# EAGLE board CT_schematic (EAGLE 7.6.0)

Size 100 x 80 mm. Coordinates in mm from the lower left corner, seen from the top.
Outline: 0,0 100,0 100,80 0,80 0,0
Copper layers (1*16): Top 0.035mm / dielectric 1.5mm / Bottom 0.035mm
Design rules "default": minimum track width 10mil, minimum drill 24mil, track to track 8mil, track to pad 8mil, pad to pad 8mil, via to via 8mil, smd to smd 8mil, copper to edge 40mil, drill to drill 8mil, minimum pad ring 10mil, minimum via ring 8mil, stop-mask expansion 4mil, vias tented up to drill 0mil, thermal gap 10mil

## Footprints (pad centres in the part's own frame; a part is rotated, then mirrored left to right if it is on the bottom)
C0603 = smd 0.8 x 0.8: 1 -0.762,0; 2 0.762,0
C0402 = smd 0.5 x 0.5: 1 -0.508,0; 2 0.508,0
C1210 = smd 1.2 x 2.5: 1 -1.524,0; 2 1.524,0
C1206 = smd 1.3 x 1.6: 1 -1.524,0; 2 1.524,0
L0603 = smd 0.8 x 0.8: 1 -0.762,0; 2 0.762,0
R0603 = smd 0.8 x 0.8: 1 -0.762,0; 2 0.762,0
UFBGA64 = smd 0.2 x 0.2: A1 -1.75,1.75; A2 -1.25,1.75; A3 -0.75,1.75; A4 -0.25,1.75; A5 0.25,1.75; A6 0.75,1.75; A7 1.25,1.75; A8 1.75,1.75; B1 -1.75,1.25; B2 -1.25,1.25; B3 -0.75,1.25; B4 -0.25,1.25; B5 0.25,1.25; B6 0.75,1.25; B7 1.25,1.25; B8 1.75,1.25; C1 -1.75,0.75; C2 -1.25,0.75; C3 -0.75,0.75; C4 -0.25,0.75; C5 0.25,0.75; C6 0.75,0.75; C7 1.25,0.75; C8 1.75,0.75; D1 -1.75,0.25; D2 -1.25,0.25; D3 -0.75,0.25; D4 -0.25,0.25; D5 0.25,0.25; D6 0.75,0.25; D7 1.25,0.25; D8 1.75,0.25; E1 -1.75,-0.25; E2 -1.25,-0.25; E3 -0.75,-0.25; E4 -0.25,-0.25; E5 0.25,-0.25; E6 0.75,-0.25; E7 1.25,-0.25; E8 1.75,-0.25; F1 -1.75,-0.75; F2 -1.25,-0.75; F3 -0.75,-0.75; F4 -0.25,-0.75; F5 0.25,-0.75; F6 0.75,-0.75; F7 1.25,-0.75; F8 1.75,-0.75; G1 -1.75,-1.25; G2 -1.25,-1.25; G3 -0.75,-1.25; G4 -0.25,-1.25; G5 0.25,-1.25; G6 0.75,-1.25; G7 1.25,-1.25; G8 1.75,-1.25; H1 -1.75,-1.75; H2 -1.25,-1.75; H3 -0.75,-1.75; H4 -0.25,-1.75; H5 0.25,-1.75; H6 0.75,-1.75; H7 1.25,-1.75; H8 1.75,-1.75
SAMTEC_FTSH-105-01-L-DV-K = smd 0.762 x 2.794: 1 -2.54,-2.032; 2 -2.54,2.032; 3 -1.27,-2.032; 4 -1.27,2.032; 5 0,-2.032; 6 0,2.032; 7 1.27,-2.032; 8 1.27,2.032; 9 2.54,-2.032; 10 2.54,2.032
TSSOP20-I = smd 0.4 x 1.35: 1 -2.925,-2.875; 2 -2.275,-2.875; 3 -1.625,-2.875; 4 -0.975,-2.875; 5 -0.325,-2.875; 6 0.325,-2.875; 7 0.975,-2.875; 8 1.625,-2.875; 9 2.275,-2.875; 10 2.925,-2.875; 11 2.925,2.875; 12 2.275,2.875; 13 1.625,2.875; 14 0.975,2.875; 15 0.325,2.875; 16 -0.325,2.875; 17 -0.975,2.875; 18 -1.625,2.875; 19 -2.275,2.875; 20 -2.925,2.875
182-009-MALE = drill 1.194 pad 1.524 octagon: 1 -5.537,10.923; 2 -2.769,10.923; 3 0,10.923; 4 2.769,10.923; 5 5.537,10.923; 6 -4.153,8.08; 7 -1.384,8.08; 8 1.384,8.08; 9 4.153,8.08 | hole 3.048: -12.446,9.501; 12.446,9.501
ABLS-25.000MHZ-B2F-T = smd 5.6 x 2.8: 1 -3.81,0; 2 5.69,0
ASEK = smd 1.4 x 1: 1 -1.1,-0.8; 2 1.1,-0.8; 3 1.1,0.8; 4 -1.1,0.8
SOIC-8_EP = smd 1.6 x 0.533: 1 -2.921,1.905; 2 -2.921,0.635; 3 -2.921,-0.635; 4 -2.921,-1.905; 5 2.921,-1.905; 6 2.921,-0.635; 7 2.921,0.635; 8 2.921,1.905 | smd 2.54 x 3.302: EPAD 0,0 | drill 0.406 pad 0.406: P$1 -0.508,0.635; P$2 0.381,0.635; P$3 -0.508,-0.635; P$4 0.381,-0.635
DFN8_2X3MC = smd 0.813 x 0.305: 1 -1.398,0.75; 2 -1.398,0.25; 3 -1.398,-0.25; 4 -1.398,-0.75; 5 1.398,-0.75; 6 1.398,-0.25; 7 1.398,0.25; 8 1.398,0.75 | smd 1.753 x 1.549: 9 0,0
JST-2-SMD = smd 1 x 4.6: 1 -1,-3.7; 2 1,-3.7 | smd 1.6 x 3.4: NC1 -3.4,1.5; NC2 3.4,1.5
FCI_10118193-0001LF = smd 0.4 x 1.35: 1 -1.3,2.675; 2 -0.65,2.675; 3 0,2.675; 4 0.65,2.675; 5 1.3,2.675 | smd 1.6 x 1.4: 6 -3.2,2.45; 7 3.2,2.45 | smd 1.9 x 1.9: 8 -1.2,0; 9 1.2,0 | hole 0.5: -3.3,0; 3.3,0
SON-6 = smd 0.55 x 0.3: 1 -0.355,0.5 | smd 0.52 x 0.3: 2 -0.37,0; 3 -0.37,-0.5; 4 0.37,-0.5; 5 0.37,0; 6 0.37,0.5
SW_4-1437565-2 = smd 1.4 x 2.1: 1 -2.23,4.55; 2 -2.23,-4.55; 3 2.23,4.55; 4 2.23,-4.55
LGM67K-G1J2-24-Z = smd 0.8 x 1.4: A -2,0; C 0,0
NC7SZ125M5X = smd 1.3 x 0.7: 1 -1.3,0.95; 2 -1.3,0; 3 -1.3,-0.95; 4 1.3,-0.95; 5 1.3,0.95
DUMMY_PACKAGE_134 = drill 0.3: 1 0,-1; 2 1.5,-1; 3 3,-1

## Placement (x,y rotation side)
C1  1e-06  [C0603]  -72.39,66.04 0 top  (outside the outline)
C2  1e-07  [C0603]  -15.24,71.12 0 top  (outside the outline)
C3  1e-07  [C0603]  -19.05,71.12 0 top  (outside the outline)
C4  1e-07  [C0603]  -22.86,71.12 0 top  (outside the outline)
C5  1e-07  [C0603]  -26.67,71.12 0 top  (outside the outline)
C6  1e-07  [C0603]  -30.48,71.12 0 top  (outside the outline)
C7  4.7e-06  [C0603]  -64.77,66.04 0 top  (outside the outline)
C8  2.2e-06  [C0603]  -68.58,66.04 0 top  (outside the outline)
C9  1e-08  [C0603]  -34.29,71.12 0 top  (outside the outline)
C10  1e-06  [C0603]  -38.1,71.12 0 top  (outside the outline)
C11  1e-11  [C0402]  -68.58,71.12 0 top  (outside the outline)
C12  1e-11  [C0402]  -72.39,71.12 0 top  (outside the outline)
C13  1e-07  [C0402]  -15.24,76.2 0 top  (outside the outline)
C14  1e-07  [C0402]  -19.05,76.2 0 top  (outside the outline)
C15  1e-07  [C0402]  -22.86,76.2 0 top  (outside the outline)
C16  1e-07  [C0402]  -26.67,76.2 0 top  (outside the outline)
C17  1e-07  [C0402]  -30.48,76.2 0 top  (outside the outline)
C18  1e-07  [C0402]  -34.29,76.2 0 top  (outside the outline)
C19  1e-07  [C0402]  -38.1,76.2 0 top  (outside the outline)
C20  1e-08  [C0402]  -41.91,76.2 0 top  (outside the outline)
C21  1e-05  [C1210]  -16.51,60.96 0 top  (outside the outline)
C22  1e-05  [C1210]  -22.86,60.96 0 top  (outside the outline)
C23  1e-05  [C1210]  -29.21,60.96 0 top  (outside the outline)
C24  1e-05  [C1210]  -35.56,60.96 0 top  (outside the outline)
C25  1e-07  [C0402]  -45.72,76.2 0 top  (outside the outline)
C26  1e-05  [C1206]  -41.91,59.69 0 top  (outside the outline)
C27  1e-05  [C1206]  -48.26,59.69 0 top  (outside the outline)
C28  1e-08  [C0402]  -49.53,76.2 0 top  (outside the outline)
C29  1e-08  [C0402]  -53.34,76.2 0 top  (outside the outline)
F1  240.0  [L0603]  -41.91,71.12 0 top  (outside the outline)
R2  1000.0  [R0603]  -45.72,71.12 0 top  (outside the outline)
R4  4700.0  [R0603]  -49.53,71.12 0 top  (outside the outline)
R5  10000.0  [R0603]  -25.4,66.04 0 top  (outside the outline)
R6  10000.0  [R0603]  -30.48,66.04 0 top  (outside the outline)
R7  10000.0  [R0603]  -35.56,66.04 0 top  (outside the outline)
R8  10000.0  [R0603]  -40.64,66.04 0 top  (outside the outline)
R9  10000.0  [R0603]  -45.72,66.04 0 top  (outside the outline)
R10  5.0  [R0603]  -53.34,71.12 0 top  (outside the outline)
R11  4031.5447154472  [R0603]  -69.85,59.69 0 top  (outside the outline)
R12  2200.0  [R0603]  -57.15,71.12 0 top  (outside the outline)
R13  10000.0  [R0603]  -50.8,66.04 0 top  (outside the outline)
R14  10000.0  [R0603]  -55.88,66.04 0 top  (outside the outline)
R15  9100.0  [R0603]  -60.96,71.12 0 top  (outside the outline)
R16  680000.0  [R0603]  -15.24,66.04 0 top  (outside the outline)
R17  120000.0  [R0603]  -20.32,66.04 0 top  (outside the outline)
R18  2000.0  [R0603]  -64.77,71.12 0 top  (outside the outline)
R19  10000.0  [R0603]  -60.96,66.04 0 top  (outside the outline)
U1  STM32F410RBI6  [UFBGA64]  -54.61,41.91 0 top  (outside the outline)
U2  FTSH-105-01-L-DV-K  [SAMTEC_FTSH-105-01-L-DV-K]  -35.56,30.48 0 top  (outside the outline)
U3  SP3203ECY-L/TR  [TSSOP20-I]  -24.13,43.18 0 top  (outside the outline)
U4  182-009-113R531  [182-009-MALE]  -36.83,6.35 0 top  (outside the outline)
U5  ABLS-25.000MHZ-B2F-T  [ABLS-25.000MHZ-B2F-T]  -45.72,53.34 0 top  (outside the outline)
U6  ASEK-32.768KHz-ECST  [ASEK]  -29.21,53.34 0 top  (outside the outline)
U7  MIC5234YME  [SOIC-8_EP]  -57.15,52.07 0 top  (outside the outline)
U8  MCP73831T-2ACI/MC  [DFN8_2X3MC]  -68.58,74.93 0 top  (outside the outline)
U9  S2B-PH-SM4-TB(LF)(SN)  [JST-2-SMD]  -38.1,44.45 0 top  (outside the outline)
U10  10118193-0001LF  [FCI_10118193-0001LF]  -63.5,40.64 0 top  (outside the outline)
U11  TPS3895ADRYR  [SON-6]  -62.23,74.93 0 top  (outside the outline)
U12  4-1437565-2  [SW_4-1437565-2]  -57.15,27.94 0 top  (outside the outline)
U13  Q65110A2395  [LGM67K-G1J2-24-Z]  -66.04,52.07 0 top  (outside the outline)
U14  nc7sz125m5x  [NC7SZ125M5X]  -53.34,59.69 0 top  (outside the outline)
U15  nc7sz125m5x  [NC7SZ125M5X]  -59.69,59.69 0 top  (outside the outline)
U16  Dummy  [DUMMY_PACKAGE_134]  -59.69,76.2 0 top  (outside the outline)

## Library data of the parts
C1-C29 F1 R2 R4-R19 U1-U16 = circuit_tree

## Nets
CLK_CRYSTAL_U1_C1: C11.1 U1.C1 U5.1
CLK_CRYSTAL_U1_D1: C12.1 U1.D1 U5.2
CLK_U1_A1: U1.A1 U6.3
GND: C1.2 C2.2 C3.2 C4.2 C5.2 C6.2 C7.2 C8.2 C9.2 C10.2 C11.2 C12.2 C13.2 C14.2 C15.2 C18.2 C19.2 C20.2 C21.2 C22.2 C23.2 C24.2 C25.2 C26.2 C27.2 C28.2 C29.2 R2.2 R5.2 R10.2 R12.2 R15.2 R17.2 R18.2 U1.C2 U1.D5 U1.D6 U1.F1 U2.3 U2.5 U3.18 U4.5 U6.2 U7.7 U7.EPAD U8.6 U8.9 U9.2 U10.5 U10.6 U10.7 U10.8 U10.9 U11.2 U13.C U14.2 U14.3 U15.1 U15.3 U16.1
INPUT_USBPOWER_5V: C26.1 R19.2 U8.1 U8.2 U10.1
NET_U1_A4: R5.1 U1.A4
NET_U1_C3: R6.1 U1.C3
NET_U1_E1: R4.1 U1.E1 U15.4
NET_U1_H1: C9.1 C10.1 F1.1 U1.G1 U1.H1
NET_U1_H6: U13.A
NET_U1_H7: C8.1 U1.H7
NET_U1_H8: U12.3 U12.4
NET_U2_9: R10.1 U2.9
NET_U3_1: C16.1 U3.1
NET_U3_2: C18.1 U3.2
NET_U3_3: C16.2 U3.3
NET_U3_4: C17.1 U3.4
NET_U3_5: C17.2 U3.5
NET_U3_6: C19.1 U3.6
NET_U3_20: U3.20
NET_U4_2: U3.14 U4.2
NET_U4_3: U3.17 U4.3
NET_U4_7: U3.13 U4.7
NET_U4_8: U3.16 U4.8
NET_U7_4: R11.2 R12.1 U7.4
NET_U8_5: R19.1 U8.5
NET_U8_8: R18.1 U8.8
NET_U11_1: R14.1 R15.1 U11.1
NET_U11_3: R16.2 R17.1 U11.3
NET_U11_4: R13.1 U11.4 U14.4 U15.2
NET_U12_1: R2.1 U12.1 U12.2
PROC_ADC1_IN1: U1.H2 U16.3
PROC_ADC1_IN2: U1.F3 U16.2
PROC_SYS_JTCK_SWCLK: R8.1 U1.B7 U2.4
PROC_SYS_JTDO_SWO: U1.A5 U2.6
PROC_SYS_JTMS_SWDIO: R9.1 U1.C7 U2.2
PROC_USART1_CTS: U1.D7 U3.8
PROC_USART1_RTS: U1.A8 U3.10
PROC_USART1_RX: U1.B4 U3.11
PROC_USART1_TX: U1.A7 U3.7
RST_OUT_U2_JTAG_RST_B: R7.1 U2.10 U14.1
VCC_S1_3V7: C21.1 C22.1 C27.1 U7.5 U7.8 U8.3 U8.4 U9.1
VCC_TIER1_3V3: C1.1 C2.1 C3.1 C4.1 C5.1 C6.1 C7.1 C13.1 C14.1 C15.1 C20.1 C23.1 C24.1 C25.1 C28.1 C29.1 F1.2 R4.2 R6.2 R7.2 R8.2 R9.2 R11.1 R13.2 R14.2 R16.1 U1.A2 U1.D2 U1.E4 U1.E5 U2.1 U3.12 U3.19 U6.4 U7.1 U11.6 U14.5 U15.5

## Tracks (layer width: path | path; a pad name or v marks a point on that pad's centre or on a via)
CLK_CRYSTAL_U1_C1  (2 unrouted)
CLK_CRYSTAL_U1_D1  (2 unrouted)
CLK_U1_A1  (1 unrouted)
GND  (59 unrouted)
INPUT_USBPOWER_5V  (4 unrouted)
NET_U1_A4  (1 unrouted)
NET_U1_C3  (1 unrouted)
NET_U1_E1  (2 unrouted)
NET_U1_H1  (4 unrouted)
NET_U1_H7  (1 unrouted)
NET_U1_H8  (1 unrouted)
NET_U2_9  (1 unrouted)
NET_U3_1  (1 unrouted)
NET_U3_2  (1 unrouted)
NET_U3_3  (1 unrouted)
NET_U3_4  (1 unrouted)
NET_U3_5  (1 unrouted)
NET_U3_6  (1 unrouted)
NET_U4_2  (1 unrouted)
NET_U4_3  (1 unrouted)
NET_U4_7  (1 unrouted)
NET_U4_8  (1 unrouted)
NET_U7_4  (2 unrouted)
NET_U8_5  (1 unrouted)
NET_U8_8  (1 unrouted)
NET_U11_1  (2 unrouted)
NET_U11_3  (2 unrouted)
NET_U11_4  (3 unrouted)
NET_U12_1  (2 unrouted)
PROC_ADC1_IN1  (1 unrouted)
PROC_ADC1_IN2  (1 unrouted)
PROC_SYS_JTCK_SWCLK  (2 unrouted)
PROC_SYS_JTDO_SWO  (1 unrouted)
PROC_SYS_JTMS_SWDIO  (2 unrouted)
PROC_USART1_CTS  (1 unrouted)
PROC_USART1_RTS  (1 unrouted)
PROC_USART1_RX  (1 unrouted)
PROC_USART1_TX  (1 unrouted)
RST_OUT_U2_JTAG_RST_B  (2 unrouted)
VCC_S1_3V7  (7 unrouted)
VCC_TIER1_3V3  (37 unrouted)